# Altium PCB wearable.PcbDoc
Units mil, origin at the board's own origin, x right, y up, seen from the top; angles counter-clockwise.
Board outline 1181.1 x 1181.1 mil, 4 copper layers (Top Layer, GND, GND2, Bottom Layer), stack 23.756 mil thick; 21 components, 10 nets, 121 pads, 0 vias.
Unrouted connection lines stored in the file: 64.
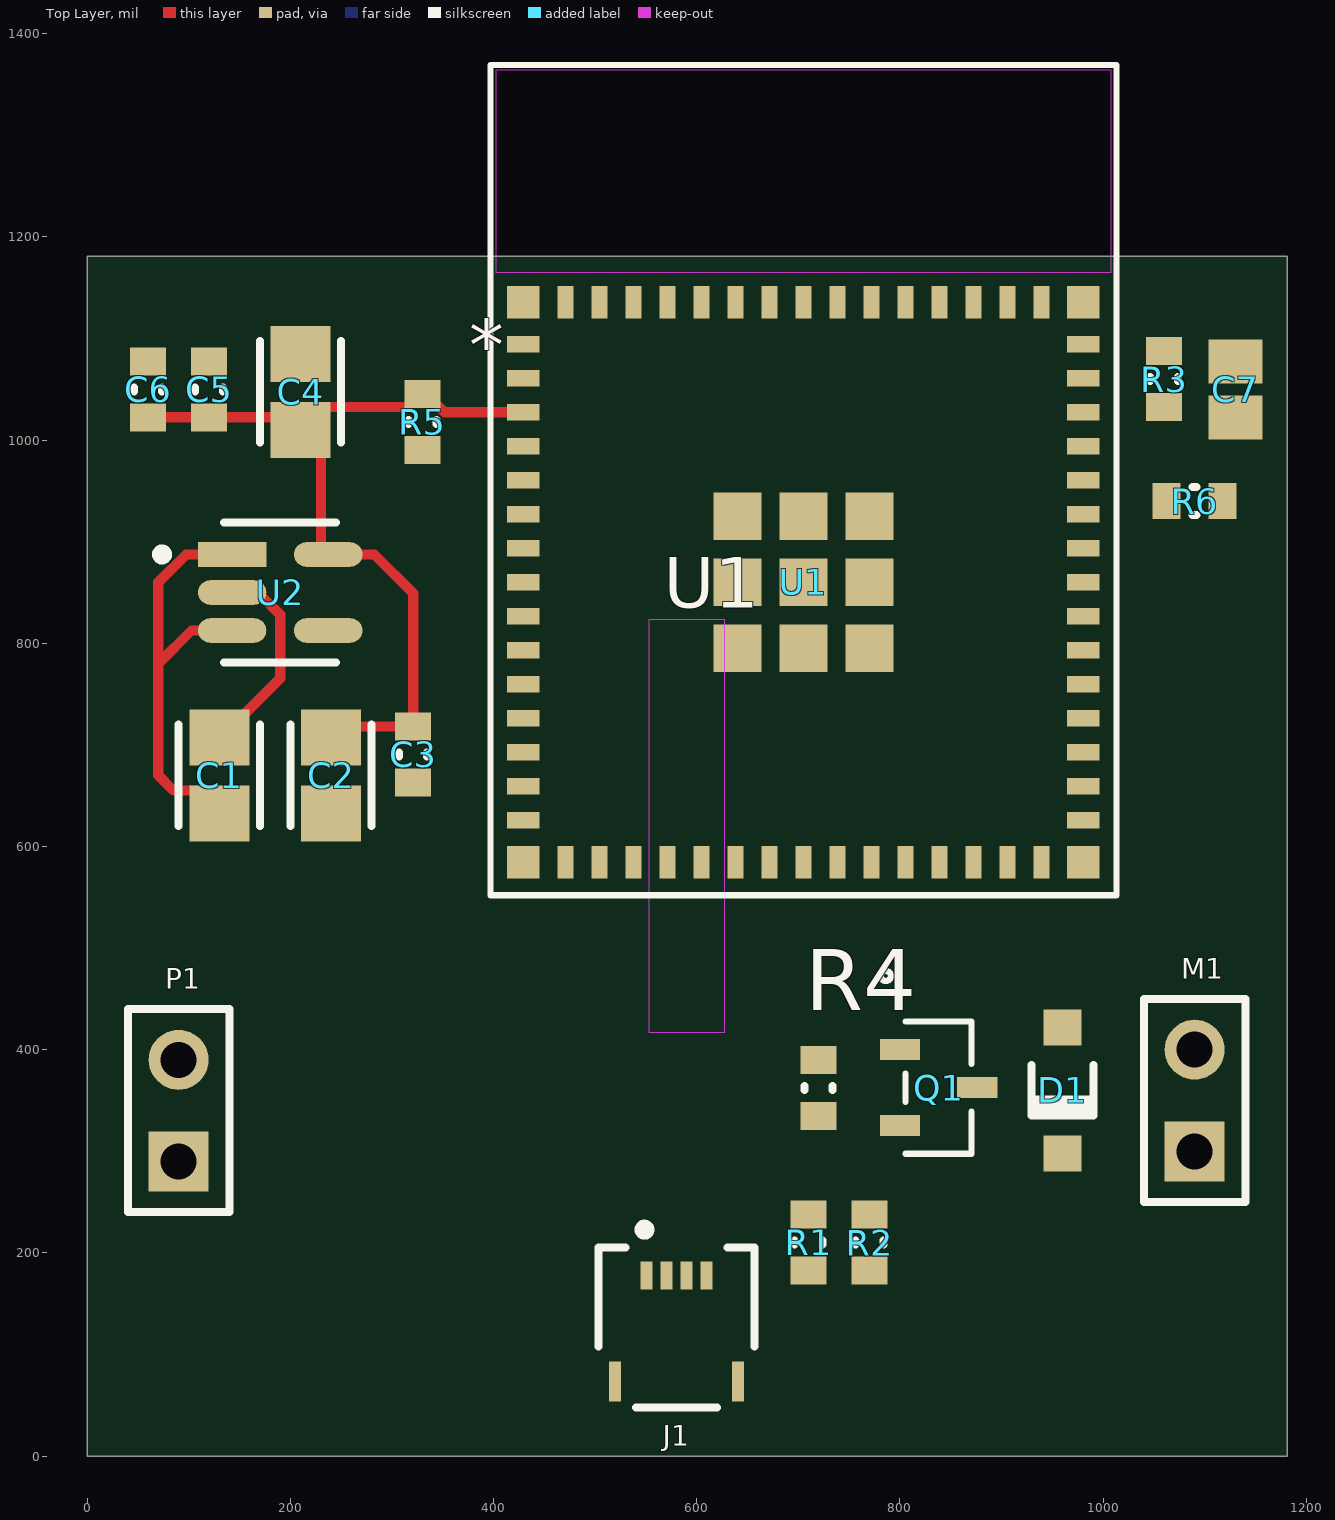
[diagram p0: Top Layer view]
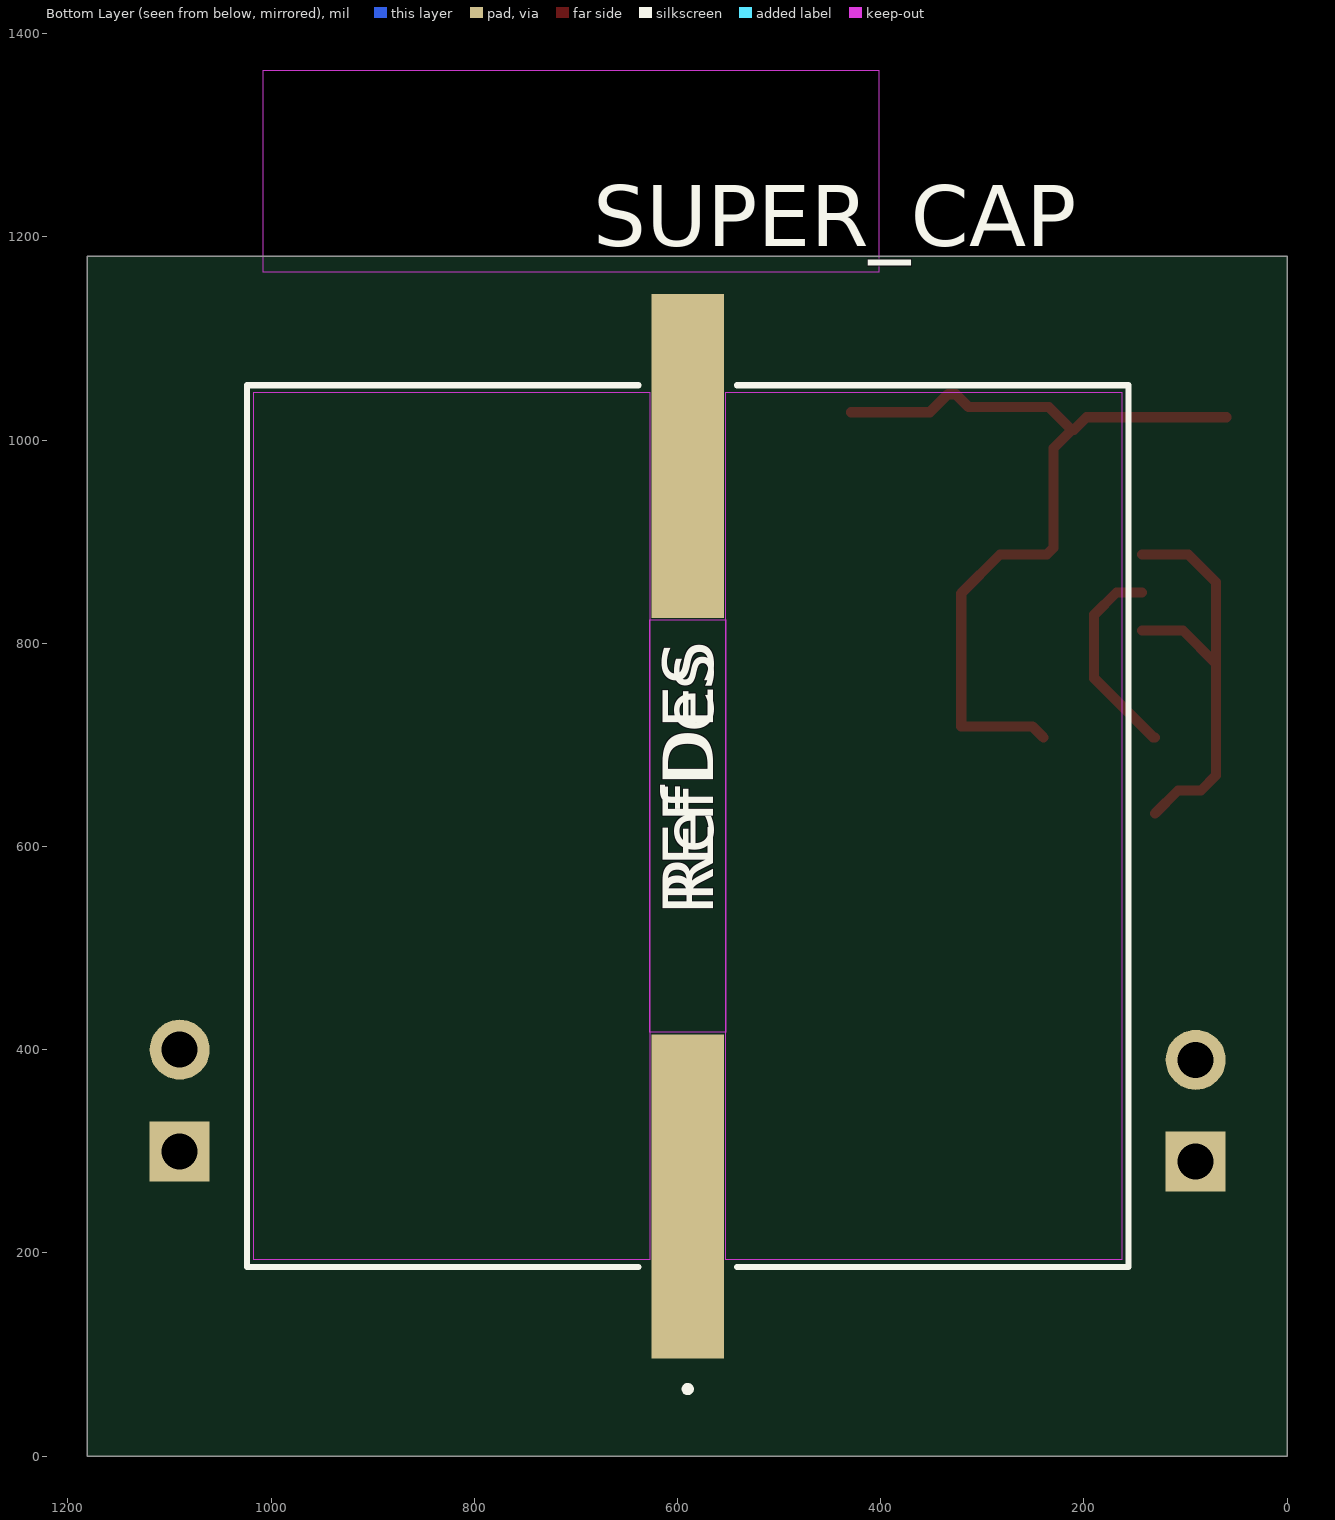
[diagram p1: Bottom Layer view, seen from below]

## Layer stack, top to bottom
Top Solder: solder mask 0.4, Solder Resist, Dk 3.5
Top Layer: signal copper 1.378
Dielectric 2: prepreg 2.8, PP-006, Dk 4.1
GND: signal copper 1.4
Dielectric 1: dielectric 12.6, FR-4, Dk 4.8
GND2: signal copper 1.4
Dielectric 3: prepreg 2.8, PP-006, Dk 4.1
Bottom Layer: signal copper 1.378
Bottom Solder: solder mask 0.4, Solder Resist, Dk 3.5

## Board outline
0,0.45 0.45,0 1181.1,0 1181.1,1181.1 0,1181.1 0,0

## Design rules (kind name [scope] priority, off if disabled: settings)
Clearance [All] p1: gap=10 ignorepadtopadclearanceinfootprint=FALSE except(6: Arc-Arc Arc-Track Arc-SMDPad Track-Track Track-SMDPad SMDPad-SMDPad)
PolygonConnect [All] p1: connectstyle=Relief reliefconductorwidth=10 reliefentries=4 polygonreliefangle="90 Angle" airgapwidth=10
RoutingVias [All] p1: holewidth=28 width=50 viastyle="Through Hole" minholewidth=28 minwidth=50 maxholewidth=28 maxwidth=50
SolderMaskExpansion [All] p1: expansion=0 istentingtop=FALSE
SupplyNets "Schematic Supply Nets" [InNet('GND')] p1: voltage=0.000
Width [All] p1: maxlimit=10 minlimit=10 preferedwidth=10
30 further rules are at their usual default settings.

## Components (designator, comment, footprint, x,y, rotation, side; value= is the part's Value field where it differs from the comment)
C1 "CAP_Murata" CAPC2013X135X45ML10T25 130,670 r90 top value=10µF
C2 "CAP_Murata" CAPC2013X135X45ML10T25 240,670 r90 top value=10µF
C3 "100nF" 0603C_L 320.87,690.62 r90 top
C4 "CAP_Murata" CAPC2013X135X45ML10T25 210,1047.4 r270 top value=10µF
C5 "100nF" 0603C_L 120,1050 r270 top
C6 "100nF" 0603C_L 60,1050 r270 top
C7 "1uF" CAPC2013X145X50LL20T25 1130,1050 r90 top
D1 "1N4148W-7-F" DIOD-SOD123-2_V 960,360 r270 top
J1 "OLED FPC" FP-503480-0440-MFG 580,90 r0 top
M1 "Motor" HDR1X2 1090,300 r90 top
P1 "Battery Pads" HDR1X2 90,290 r90 top
Q1 "SI2302CDS-T1-GE3" TO-236_VIS-L 838.03,362.6 r270 top
R1 "4.7k" 0603_L 710,210 r90 top
R2 "4.7k" 0603_L 770,210 r90 top
R3 "10k" 0603_L 1060,1060 r90 top
R4 "10k" 0603_L 720,362.44 r90 top
R5 "10k" 0603_L 330,1017.56 r90 top
R6 "10k" 0603_L 1090,940 r0 top
SUPER_CAP "1F" CAP_FC-105_KEM-L 590,620 r90 bottom
U1 "ESP32-S3-MINI-1-N8" ESP32-S3-MINI-1_EXP 704.96,960.5 r0 top
U2 "AP2112K-3.3TRG1" FP-SOT25-IPC_A 190,850 r0 top

## Footprints (in the part's own frame and the unit in brackets; to place one, negate y for a bottom-side part, rotate by r counter-clockwise, add the part's x,y. Pads: shape width x height; smd on the part's side, far side on the other; paste and mask are expansions set on the pad)
0603_L [mm]
  rect 0.7x0.9 smd: 1(-0.7,0) 2(0.7,0)
  silkscreen extent -0.05,-0.35 0.05,0.35, body extent -0.85,-0.47 0.85,0.47, height 0.6
0603C_L [mm]
  rect 0.7x0.9 smd: 1(-0.7,0) 2(0.7,0)
  silkscreen extent -0.05,-0.35 0.05,0.35, body extent -0.87,-0.47 0.88,0.48, height 1
CAP_FC-105_KEM-L [mil]
  rect 319x71 smd paste+0 mask+0: 1(-364.5,0) 2(364.5,0)
  Top Layer keep-out region: -203,-37.5 -203,37.5 203,37.5 203,-37.5
  Top Layer keep-out region: -427,37.5 -427,427 427,427 427,37.5
  Top Layer keep-out region: -427,-427 -427,-37.5 427,-37.5 427,-427
  Keep-Out Layer region: -203,-37.5 -203,37.5 203,37.5 203,-37.5
  silkscreen extent -557,-434 434,434, body extent -431,-429 431,429, height 415
CAPC2013X135X45ML10T25 [mm]
  rect 1.4x1.5 smd: 1(-0.95,0) 2(0.95,0)
  silkscreen extent -1.27,-1.02 1.27,1.02, body extent -1.05,-0.67 1.05,0.67, height 1.35
CAPC2013X145X50LL20T25 [mm] "Chip Capacitor, 2-Leads, Body 2.00x1.25mm, IPC High Density"
  rect 1.1x1.35 smd: 1(-0.7,0) 2(0.7,0)
  body extent -1.1,-0.72 1.1,0.72, height 1.45
DIOD-SOD123-2_V [mm] "SOD123, 2-Leads, Body 2.7x1.55mm, Height 1.45mm"
  rect 0.9x0.95 smd: 1(-1.575,0) 2(1.575,0)
  silkscreen extent -0.64,-0.83 0.64,0.77, body extent -1.35,-0.77 1.35,0.77, height 1.45
ESP32-S3-MINI-1_EXP [mil]
  rect 32x16 smd paste+0 mask+0: 1(-275.59,133.75) 2(-275.59,100.29) 3(-275.59,66.82) 4(-275.59,33.36) 5(-275.59,-0.11) 6(-275.59,-33.57) 7(-275.59,-67.04) 8(-275.59,-100.5) 9(-275.59,-133.96) 10(-275.59,-167.43) 11(-275.59,-200.89) 12(-275.59,-234.36) 13(-275.59,-267.82) 14(-275.59,-301.29) 15(-275.59,-334.75) 31(275.59,-334.75) 32(275.59,-301.29) 33(275.59,-267.82) 34(275.59,-234.36) 35(275.59,-200.89) 36(275.59,-167.43) 37(275.59,-133.96) 38(275.59,-100.5) 39(275.59,-67.04) 40(275.59,-33.57) 41(275.59,-0.11) 42(275.59,33.36) 43(275.59,66.82) 44(275.59,100.29) 45(275.59,133.75)
  rect 16x32 smd paste+0 mask+0: 16(-234.25,-376.09) 17(-200.79,-376.09) 18(-167.32,-376.09) 19(-133.86,-376.09) 20(-100.39,-376.09) 21(-66.93,-376.09) 22(-33.46,-376.09) 23(0,-376.09) 24(33.46,-376.09) 25(66.93,-376.09) 26(100.39,-376.09) 27(133.86,-376.09) 28(167.32,-376.09) 29(200.79,-376.09) 30(234.25,-376.09) 46(234.25,175.09) 47(200.79,175.09) 48(167.32,175.09) 49(133.86,175.09) 50(100.39,175.09) 51(66.93,175.09) 52(33.46,175.09) 53(0,175.09) 54(-33.46,175.09) 55(-66.93,175.09) 56(-100.39,175.09) 57(-133.86,175.09) 58(-167.32,175.09) 59(-200.79,175.09) 60(-234.25,175.09)
  rect 47x47 smd paste+0 mask+0: 61(0,-100.5) 66(-64.96,-35.54) 67(-64.96,-100.5) 68(-64.96,-165.46) 69(0,-165.46) 70(64.96,-165.46) 71(64.96,-100.5) 72(64.96,-35.54) 73(0,-35.54)
  rect 32x32 smd paste-16 mask-16: 62(-275.59,175.09) 63(-275.59,-376.09) 64(275.59,-376.09) 65(275.59,175.09)
  Keep-Out Layer region: 303,403.5 -303,403.5 -303,204.5 303,204.5
  silkscreen extent -308,-408 308,408
FP-503480-0440-MFG [mm]
  rect 0.3x0.7 smd paste+0 mask+0: 1(-0.75,2.225) 2(-0.25,2.225) 3(0.25,2.225) 4(0.75,2.225)
  rect 0.3x1 smd paste+0 mask+0: 5(-1.54,-0.425) 6(1.54,-0.425)
  silkscreen extent -1.95,-1.07 1.95,3.5, body extent -2.05,-1.17 2.05,3.03, height 0.25
FP-SOT25-IPC_A [mm]
  rect 1.707x0.616 smd paste+0 mask+0: 1(-1.201,0.95)
  rrect100% 1.707x0.616 smd paste+0 mask+0: 2(-1.201,0) 3(-1.201,-0.95) 4(1.201,-0.95) 5(1.201,0.95)
  silkscreen extent -3.08,-1.75 1.4,1.75, body extent -2.55,-2 2.55,2, height 0.25
HDR1X2 [mm] "Connector; Header; 2 Position"
  rect 1.5x1.5 hole 0.9: 1(0,0)
  round 1.5 hole 0.9: 2(2.54,0)
  silkscreen extent -1.27,-1.27 3.81,1.27
TO-236_VIS-L [mm]
  rect 0.528x1.01 smd paste+0 mask+0: 1(-0.95,-0.966) 2(0.95,-0.966) 3(0,0.966)
  silkscreen extent -2.92,-1.45 1.65,0.83, body extent -1.52,-1.32 1.52,1.32, height 1.12

## Part data
C1 C2 C4: library part CAP_10uF_25V_0805, "Ceramic Capacitor, Multilayer, Ceramic, 25V, 10% +Tol, 10% -Tol, X5R, 15% TC, 10uF, Surface Mount, 0805", Capacitor Type=Ceramic, Case/Package=0805, Manufacturer=Murata, Manufacturer Part Number=GRM21BR61E106KA73L, Max Operating Temperature=85°C, Min Operating Temperature=-55°C, Tolerance=10%, Component Type=Capacitors, Mounting Technology="Surface Mount", Pins=2, RoHS Compliant=Yes
C3 C5 C6: library part Cap100nF_50V_0603, "Ceramic Capacitor, Multilayer, Ceramic, 50V, 80% +Tol, 20% -Tol, Y5V, -82/+22% TC, 0.1uF, Surface Mount, 0603", Capacitor Type=Ceramic, Case/Package=0603, Manufacturer=Yageo, Manufacturer Part Number=CC0603ZRY5V9BB104, Max Operating Temperature=85°C, Min Operating Temperature=-30°C, Package Shape=Rectangular, Package Style=SMTMeter, Rated DC Voltage (URdc)=50V, Temperature Characteristics Code=Y5V, Tolerance  (fill in as +-)=20%, Tolerance (fill in as +-)=80%, Component Type=Capacitors, Dielectric Material=Ceramic, Height=0.8mm, JESD-609 Code=e3, Length=1.6mm, Mounting Technology="Surface Mount", Multilayer=Yes, Packaging="Tape and Reel", Pins=2, Reach SVHC Compliant=Yes, RoHS Compliant=Yes, Terminal Finish=Nickel, Termination=Wraparound, Voltage Rating=50V, Width=0.8mm
C7: library part CMP-1036-04746-2, Manufacturer=Kemet, Part Number=C0805C105K4PACTU
D1: library part CMP-2000-04932-2, "Fast Switching Diode, 100 V, 0.15 A, -65 to 150 degC, 2-Pin?SOD123, RoHS, Tape and Reel", If - Forward Current=0.15A, Ir - Reverse Current=1uA, Manufacturer=DiodesIncorporated, Max Surge Current=2A, Maximum Operating Temperature=+150C, Minimum Operating Temperature=-65C, Operating Temperature Range=-65Cto+150C, Package / Case=SOD-123, Package Reference=SOD123-2, Peak Reverse Voltage=100V, Vf - Forward Voltage=1.25V, Brand=DiodesIncorporated, Configuration=Single, Datasheet URL=http://www.farnell.com/datasheets/1915529.pdf, Datasheet Version="Rev. 24-2, 10/2013", Factory Pack Quantity=3000, Height=1.25mm, Length=2.85mm, Manufacturer URL=http://www.diodes.com/, Mounting Style=SMD/SMT, Package URL=http://www.diodes.com/datasheets/ds18004.pdf, Packaging=Reel, Product=SwitchingDiodes, Product Category=Diodes-GeneralPurpose,Power,Switching, Recovery Time=4ns, RoHS=True, Series=1N4148, Type=SwitchingDiode, Unit Weight=0.000353oz, Width=1.7mm
J1: library part CMP-00257-52963779-1, "503480-0440 Molex 503480-0440 FFC & FPC Connectors, .5mm, Ptch FPC Right-Angle Sm Dual Cont 4Cir", Current Rating=500mA, Flammability Rating="UL94 V-0", Manufacturer Lifecycle Status=ACTIVE, Max Operating Temperature=85°C, Min Operating Temperature=-40°C, Voltage Rating=50V, Actuator Material="Glass, Nylon, Polyamide", Contact Material="Bronze, Gold, Nickel", Contact Plating=Gold, Country of Origin=KR, Halogen Free="Low Halogen", Height=2.12mm, Housing Material=Polymer, Lifecycle Status=Production, Mount="Surface Mount", NexarPartId=52963779, Number of Circuits=4, Number of Contacts=4, Number of Pins=4, Number of Positions=4, Number of Rows=1, Orientation="Right Angle", Pitch=508µm, Plating=Gold, RoHS=Compliant, Schedule B=8536694040, Termination=Solder, Wire/Cable Type=Straight
M1 P1: library part "Header 2", "Header, 2-Pin", LatestRevisionDate=17-Jul-2002, LatestRevisionNote="Re-released for DXP Platform.", Publisher="Altium Limited"
Q1: "N-CHANNEL 20-V (D-S) MOSFET", Manufacturer_Name=Vishay, Copyright="Copyright (C) 2026 Ultra Librarian. All rights reserved.", Manufacturer_Part_Number=SI2302CDS-T1-GE3, RefDes=RefDes, Type=Type
R1 R2: library part Res4K7_0603, "Res4K7_0603", Manufacturer=Yageo, Operating Temperature="-55°C ~ 155°C", Package / Case="0603 (1608 Metric)", Power (Watts)="0.1W, 1/10W", Supplier Device Package=0603, Temperature Coefficient=±25ppm/°C, Tolerance=0.5%, Category=Resistors, Component Type=Resistors, ComponentLink1Description=http://www.yageo.com/documents/recent/PYu-RT_1-to-0.05_RoHS_L_6.pdf, ComponentLink1URL=http://www.yageo.com/documents/recent/PYu-RT_1-to-0.05_RoHS_L_6.pdf, Composition="Thin Film", Design Item ID=Res4K7_0603, Failure Rate=-, Features="Moisture Resistant", Height="0.022\" (0.55mm)", Number of Terminations=2, Packaging="Cut Tape (CT)", Part Status=Active, Pricing 1="1=0.22, 10=0.184, 25=0.134, 100=0.0721, 250=0.05532, 500=0.04358, 1000=0.03018, 2500=0.02766 (USD)", Resistance (Ohms)=4.7k, RoHS="RoHS Compliant", Size / Dimension="0.063\" L x 0.031\" W (1.60mm x 0.80mm)", Source=WCT.SchLib, Stock 1=28874
R3 R4 R5 R6: library part Res10K_0603, "Res10K_0603", Manufacturer="Panasonic Electronic Components", Manufacturer Part Number=ERJ-3GEYJ102V, Operating Temperature="-55°C ~ 155°C", Package / Case="0603 (1608 Metric)", Power (Watts)="0.1W, 1/10W", Supplier Device Package=0603, Temperature Coefficient=±200ppm/°C, Tolerance=5%, Category=Resistors, Component Type=Resistors, Composition="Thick Film", Design Item ID=Res10K_0603, Failure Rate=-, Features="Automotive AEC-Q200", Height="0.022\" (0.55mm)", Number of Terminations=2, Packaging="Cut Tape (CT)", Part Status=Active, Resistance (Ohms)=10k, RoHS="RoHS Compliant", Size / Dimension="0.063\" L x 0.031\" W (1.60mm x 0.80mm)", Source=WCT.SchLib
SUPER_CAP: library part FC0H105ZFTBR44-SS, "Electric Double Layer Capacitor, 5.5V, 80% +Tol, 20% -Tol, 1000000uF, Surface Mount, 8585", ESR (Equivalent Series Resistance)=7Ω, Manufacturer="Yageo Group", Max Operating Temperature=70°C, Min Operating Temperature=-25°C, Voltage Rating (DC)=5.5V, Category="Electric Double Layer Capacitors", ComponentLink1Description=https://datasheet.octopart.com:443/FC0H105ZFTBR44-SS-KEMET-datasheet-182056571.pdf?src-supplier=IHS, ComponentLink1URL=https://datasheet.octopart.com:443/FC0H105ZFTBR44-SS-KEMET-datasheet-182056571.pdf?src-supplier=IHS, ComponentLink2Description=https://datasheet.octopart.com:443/FC0H105ZFTBR44-SS-KEMET-datasheet-140123096.pdf?src-supplier=Farnell, ComponentLink2URL=https://datasheet.octopart.com:443/FC0H105ZFTBR44-SS-KEMET-datasheet-140123096.pdf?src-supplier=Farnell, ComponentLink3Description=https://datasheet.octopart.com:443/FC0H105ZFTBR44-SS-KEMET-datasheet-86449767.pdf?src-supplier=Farnell, ComponentLink3URL=https://datasheet.octopart.com:443/FC0H105ZFTBR44-SS-KEMET-datasheet-86449767.pdf?src-supplier=Farnell, ComponentLink4Description=https://datasheet.octopart.com:443/FC0H105ZFTBR44-SS-KEMET-datasheet-181965048.pdf?src-supplier=Farnell, ComponentLink4URL=https://datasheet.octopart.com:443/FC0H105ZFTBR44-SS-KEMET-datasheet-181965048.pdf?src-supplier=Farnell, ComponentLink5Description=https://datasheet.octopart.com:443/FC0H105ZFTBR44-SS-KEMET-datasheet-76759449.pdf?src-supplier=Farnell, ComponentLink5URL=https://datasheet.octopart.com:443/FC0H105ZFTBR44-SS-KEMET-datasheet-76759449.pdf?src-supplier=Farnell, ComponentLink6Description=https://datasheet.octopart.com:443/FC0H105ZFTBR44-SS-KEMET-datasheet-176335232.pdf?src-supplier=Newark, ComponentLink6URL=https://datasheet.octopart.com:443/FC0H105ZFTBR44-SS-KEMET-datasheet-176335232.pdf?src-supplier=Newark, Diameter=21mm, Height=10.5mm, Length=21.6mm, Lifecycle Status=Production, Manufacturer Part Number=FC0H105ZFTBR44-SS, Mounting Technology="Surface Mount", REACH SVHC=Yes, RoHS=Compliant, Schedule B="8532290040, 8532290040|8532290040|8532290040|8532290040|8532290040", Stock=7, Supplier="Arrow Electronics", Supplier Part Number=FC0H105ZFTBR44-SS, Width=21.6mm
U1: library part ESP32-S3, "SMD module, ESP32-S3FN8, 8 MB SPI flash, PCB antenna", LCSC Part No.=C2913206, Manufacturer="Espressif Systems", Supplier Part Number=5407-ESP32-S3-MINI-1-N8CT-ND, Category="RF Transceiver Modules and Modems", ComponentLink1Description=https://datasheet.octopart.com:443/ESP32-S3-MINI-1-N8-Espressif-Systems-datasheet-194171672.pdf?src-supplier=LCSC, ComponentLink1URL=https://datasheet.octopart.com:443/ESP32-S3-MINI-1-N8-Espressif-Systems-datasheet-194171672.pdf?src-supplier=LCSC, ComponentLink2Description=https://datasheet.octopart.com:443/ESP32-S3-MINI-1-N8-Espressif-Systems-datasheet-188867343.pdf?src-supplier=TME, ComponentLink2URL=https://datasheet.octopart.com:443/ESP32-S3-MINI-1-N8-Espressif-Systems-datasheet-188867343.pdf?src-supplier=TME, ComponentLink3Description=https://datasheet.octopart.com:443/ESP32-S3-MINI-1-N8-Espressif-Systems-datasheet-165560562.pdf?src-supplier=TME, ComponentLink3URL=https://datasheet.octopart.com:443/ESP32-S3-MINI-1-N8-Espressif-Systems-datasheet-165560562.pdf?src-supplier=TME, ComponentLink4Description=https://datasheet.octopart.com:443/ESP32-S3-MINI-1-N8-Espressif-Systems-datasheet-165560559.pdf?src-supplier=TME, ComponentLink4URL=https://datasheet.octopart.com:443/ESP32-S3-MINI-1-N8-Espressif-Systems-datasheet-165560559.pdf?src-supplier=TME, ComponentLink5Description=https://datasheet.octopart.com:443/ESP32-S3-MINI-1-N8-Espressif-Systems-datasheet-192318068.pdf?src-supplier=HQonline, ComponentLink5URL=https://datasheet.octopart.com:443/ESP32-S3-MINI-1-N8-Espressif-Systems-datasheet-192318068.pdf?src-supplier=HQonline, Manufacturer Part Number=ESP32-S3-MINI-1-N8, Pricing="1=5.43, 10=4.703, 25=4.4492, 100=4.0995, 250=3.89008 (USD)", RoHS=Compliant, Stock=7176, Supplier=DigiKey
U2: library part CMP-12756-000035-1, "IC REG LINEAR 3.3V 600MA SOT25", Case/Package=SOT-23-5, Dropout Voltage=250mV, Max Input Voltage=6V, Max Operating Temperature=85°C, Max Output current=600mA, Min Input Voltage=2.5V, Min Operating Temperature=-40°C, Output Voltage=3.3V, Package Quantity=1, Quiescent Current=55uA, Accuracy=1.5%, Height=1.3mm, Lead Free="Lead Free", Length=3.1mm, Mount="Surface Mount", Number of Outputs=1, Number of Pins=5, Number of Regulators=1, Output Current=600mA, Output Type=Fixed, Packaging="Tape and Reel", Polarity=Positive, Width=1.7mm

## Nets (pads, with @x,y where several pads share a name; then routed paths per layer and width w, separated by ;. In a path a pad name is that pad's centre, name@x,y a point inside that pad or via, vN(x,y) a via of type N, cw(c..) or ccw(c..) an arc to the next point about the centre after c; other vN are vias at no path point)
3V3_RAIL: C2.2 C3.2 C4.2 C5.2 C6.2 D1.2 J1.2 M1.1 R1.2 R2.2 R3.1 R5.2 U1.3 U2.5 | length 845.7
  Top Layer w10: C6.2 197.56,1022.44 C4.2 C4.2@211.97,1010 ; C2.2 250.78,718.18 C3.2 320.87,849.13 282.6,887.4 236.58,887.4 230,893.98 230,991.97 C4.2@211.97,1010 ; U1.3 351.73,1027.32 333.94,1045.12 326.06,1045.12 313.43,1032.48 234.45,1032.48 C4.2@211.97,1010
GND: C1.2 C2.1 C3.1 C4.1 C5.1 C6.1 C7.1 J1.1 P1.2 Q1.2 R4.1 R6.2 SUPER_CAP.2 U1.1 U1.2 U1.42 U1.43 U1.46 U1.47 U1.48 U1.49 U1.50 U1.51 U1.52 U1.53 U1.54 U1.55 U1.56 U1.57 U1.58 U1.59 U1.60 U1.61 U1.62 U1.63 U1.64 U1.65 U1.66 U1.67 U1.68 U1.69 U1.70 U1.71 U1.72 U1.73 U2.2 | length 203
  Top Layer w10: C1.2 131.97,707.4 190,765.43 190,828.07 168.07,850 U2.2
NetC7_2: C7.2 R3.2 U1.45
NetD1_1: D1.1 M1.2 Q1.3
NetJ1_3: J1.3 R2.1 U1.13
NetJ1_4: J1.4 R1.1 U1.12
NetQ1_1: Q1.1 R4.2 U1.8
NetR5_1: R5.1 U1.4
NetR6_1: R6.1 U1.44
VBAT_RAW: C1.1 P1.1 SUPER_CAP.1 U2.1 U2.3 | length 435.8
  Top Layer w10: C1.1 107.44,655.16 84.84,655.16 70,670 70,780 ; U2.3 102.6,812.6 70,780 ; U2.1 97.4,887.4 70,860 70,780
pads on no net: J1.5 J1.6 U1.5 U1.6 U1.7 U1.9 U1.10 U1.11 U1.14 U1.15 U1.16 U1.17 U1.18 U1.19 U1.20 U1.21 U1.22 U1.23 U1.24 U1.25 U1.26 U1.27 U1.28 U1.29 U1.30 U1.31 U1.32 U1.33 U1.34 U1.35 U1.36 U1.37 U1.38 U1.39 U1.40 U1.41 U2.4

## Text inside footprints (layer, text, board x,y; h text height)
SUPER_CAP: Bottom Overlay "RefDes" at 565,545 h50 r270; Bottom Overlay "REFDES" at 565,532.5 h50 r270; Bottom 3D Body "RefDes2" at 565,532.5 h50 r270
U1: Top Overlay "*" at 375.87,1069.25 h50; Top 3D Body "*" at 457.87,1069.25 h50